# Altium PCB test1.PcbDoc
Units mm, origin at the board's own origin, x right, y up, seen from the top; angles counter-clockwise.
Board outline 70 x 20 mm, 3 copper layers (Top Layer, GND, Bottom Layer), stack 0.488 mm thick; 23 components, 27 nets, 107 pads, 49 vias.
Unrouted connection lines stored in the file: 59.
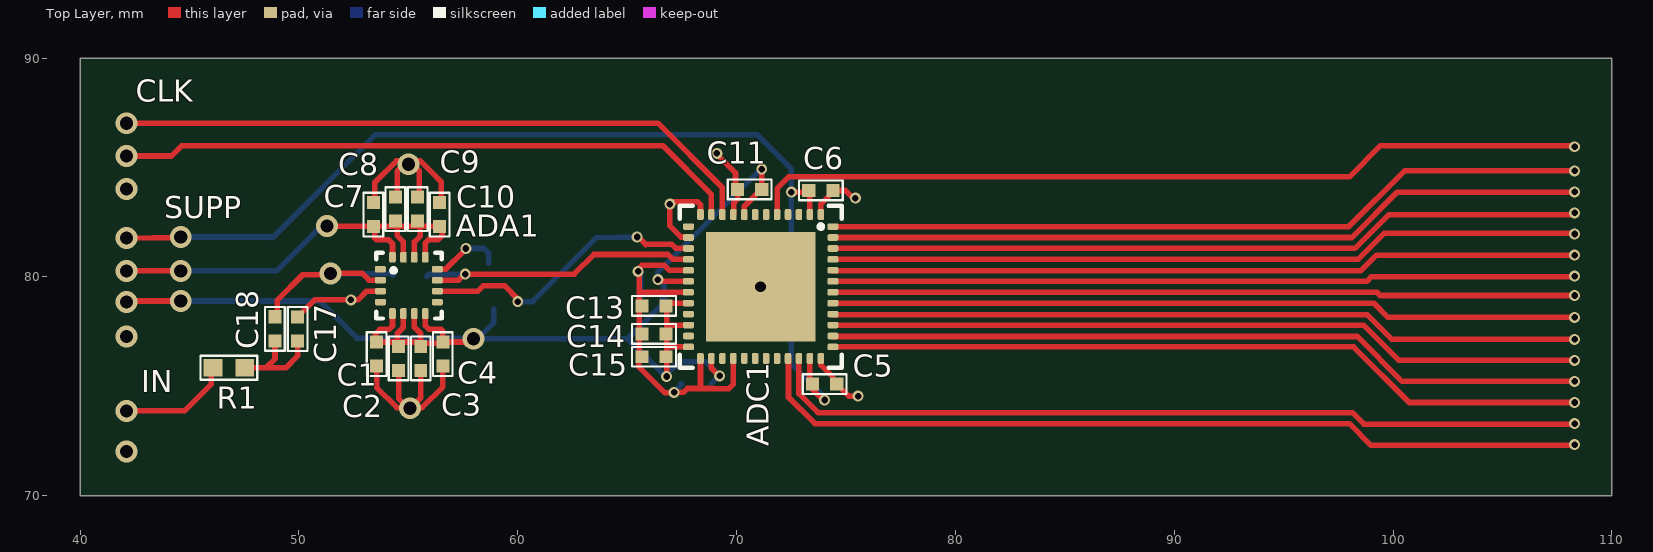
[diagram p0: Top Layer view]
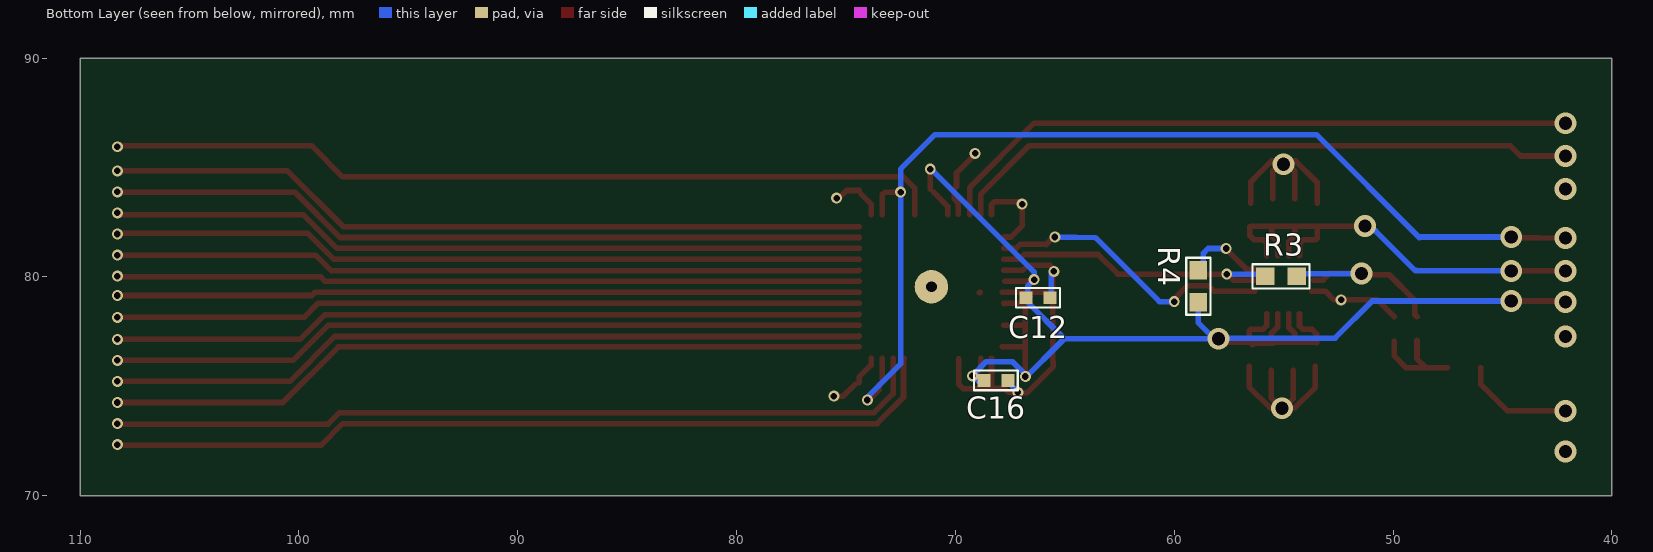
[diagram p1: Bottom Layer view, seen from below]
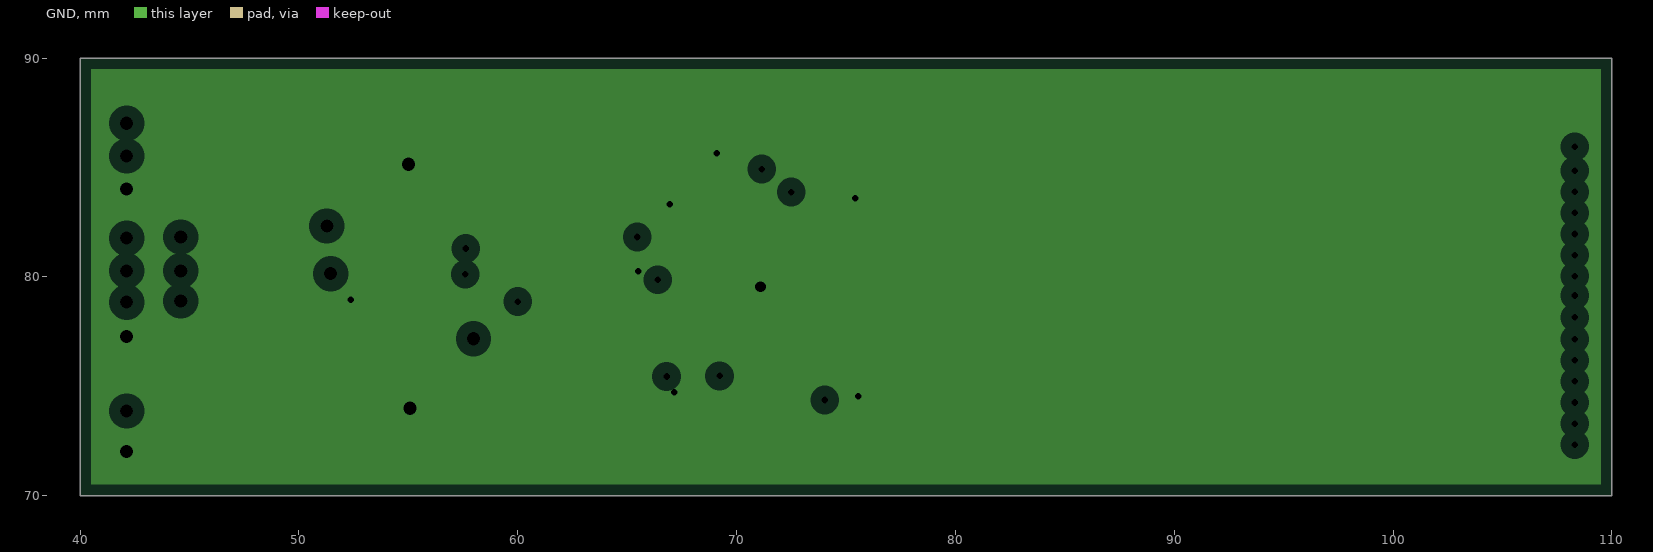
[diagram p2: GND, clearances drawn from the general rule]

## Layer stack, top to bottom
Top Solder: solder mask 0.0102, Solder Resist, Dk 3.5
Top Layer: signal copper 0.0356
Dielectric 1: core 0.254, FR-4, Dk 4.2
GND: plane copper 0.036, net GND
Dielectric 2: prepreg 0.127, Dk 4.2
Bottom Layer: signal copper 0.0356
Bottom Solder: solder mask 0.0102, Solder Resist, Dk 3.5

## Board outline
40,70 40,90 110,90 110,70

## Design rules (kind name [scope] priority, off if disabled: settings)
Clearance [All] p1: gap=0.2 ignorepadtopadclearanceinfootprint=FALSE
ComponentClearance [All] p1: gap=0 collisioncheckmode=3 verticalgap=2540 showdistances=FALSE
HoleToHoleClearance [All] p1: gap=0.2 allowstackedmicrovias=TRUE
MinimumSolderMaskSliver [All] p1: minsoldermaskwidth=0
PlaneClearance [All] p1: clearance=0.508
PlaneConnect [All] p1: planeconnectstyle=Relief reliefexpansion=0.508 reliefentries=4 reliefconductorwidth=0.254 reliefairgap=0.254
PolygonConnect [All] p1: connectstyle=Relief reliefconductorwidth=0.254 reliefentries=4 polygonreliefangle="90 Angle" airgapwidth=0.254
RoutingVias [All] p1: holewidth=0.711 width=1.27 viastyle="Through Hole" minholewidth=0.711 minwidth=1.27 maxholewidth=0.711 maxwidth=1.27
SilkToSilkClearance [All] p1: silktosilkclearance=0
SilkToSolderMaskClearance [IsPad] p1: minsilkscreentomaskgap=0.1 clearancetoexposedcopper=TRUE
SolderMaskExpansion [All] p1: expansion=0.102
Width [All] p1: maxlimit=0.254 minlimit=0.254 preferedwidth=0.254
23 further rules are at their usual default settings.

## Components (designator, comment, footprint, x,y, rotation, side; value= is the part's Value field where it differs from the comment)
ADA1 "*" "PCBComponent_1 - duplicate1" 55.025,79.6 r0 top
ADC1 "ADC" "PCBComponent_1 - duplicate2" 71.1,79.55 r270 top (schematic designator =model1)
C1 "0.1uF" "PCBComponent_1 - duplicate" 53.55,76.475 r270 top
C2 "0.1uF" "PCBComponent_1 - duplicate" 54.558,76.275 r270 top
C3 "0.1uF" "PCBComponent_1 - duplicate" 55.567,76.275 r270 top
C4 "0.1uF" "PCBComponent_1 - duplicate" 56.575,76.475 r270 top
C5 "0.1uF" "PCBComponent_1 - duplicate" 74.025,75.1 r180 top
C6 "0.1uF" "PCBComponent_1 - duplicate" 73.85,83.95 r0 top
C7 "0.1uF" "PCBComponent_1 - duplicate" 53.4,82.85 r270 top
C8 "0.1uF" "PCBComponent_1 - duplicate" 54.413,83.1 r270 top
C9 "0.1uF" "PCBComponent_1 - duplicate" 55.425,83.1 r270 top
C10 "0.1uF" "PCBComponent_1 - duplicate" 56.425,82.85 r270 top
C11 "0.1uF" "PCBComponent_1 - duplicate" 70.6,84 r0 top
C12 "0.1uF" "PCBComponent_1 - duplicate" 66.227,79.05 r180 bottom
C13 "0.1uF" "PCBComponent_1 - duplicate" 66.225,78.675 r0 top
C14 "0.1uF" "PCBComponent_1 - duplicate" 66.225,77.4 r0 top
C15 "0.1uF" "PCBComponent_1 - duplicate" 66.225,76.35 r180 top
C16 "0.1uF" "PCBComponent_1 - duplicate" 68.15,75.275 r0 bottom
C17 "0.1uF" "PCBComponent_1 - duplicate" 49.942,77.621 r90 top
C18 "0.1uF" "PCBComponent_1 - duplicate" 48.906,77.629 r90 top
R1 "1k" PCBComponent_1 46.8,75.85 r180 top
R3 "500" PCBComponent_1 55.125,80.025 r0 bottom
R4 "1k" PCBComponent_1 58.9,79.575 r270 bottom

## Footprints (in the part's own frame and the unit in brackets; to place one, negate y for a bottom-side part, rotate by r counter-clockwise, add the part's x,y. Pads: shape width x height; smd on the part's side, far side on the other; paste and mask are expansions set on the pad)
PCBComponent_1 [mm]
  rect 0.85x0.8 smd: 0(-0.725,0) 1(0.725,0)
  silkscreen extent -1.3,-0.55 1.3,0.55
"PCBComponent_1 - duplicate" [mm]
  rect 0.6x0.59 smd: 0(-0.55,0) 1(0.55,0)
  silkscreen extent -1,-0.45 1,0.45
"PCBComponent_1 - duplicate1" [mm]
  rrect50% 0.5x0.3 smd: 1(-1.3,0.75) 2(-1.3,0.25) 3(-1.3,-0.25) 4(-1.3,-0.75) 9(1.3,-0.75) 10(1.3,-0.25) 11(1.3,0.25) 12(1.3,0.75)
  rrect50% 0.3x0.5 smd: 5(-0.75,-1.275) 6(-0.25,-1.275) 7(0.25,-1.275) 8(0.75,-1.275) 13(0.75,1.3) 14(0.25,1.3) 15(-0.25,1.3) 16(-0.75,1.3)
  silkscreen extent -1.5,-1.5 1.5,1.5
"PCBComponent_1 - duplicate2" [mm]
  rrect50% 0.5x0.3 smd: 1(-3.3,2.75) 2(-3.3,2.25) 3(-3.3,1.75) 4(-3.3,1.25) 5(-3.3,0.75) 6(-3.3,0.25) 7(-3.3,-0.25) 8(-3.3,-0.75) 9(-3.3,-1.25) 10(-3.3,-1.75) 11(-3.3,-2.25) 12(-3.3,-2.75) 25(3.275,-2.75) 26(3.275,-2.25) 27(3.275,-1.75) 28(3.275,-1.25) 29(3.275,-0.75) 30(3.275,-0.25) 31(3.275,0.25) 32(3.275,0.75) 33(3.275,1.25) 34(3.275,1.75) 35(3.275,2.25) 36(3.275,2.75)
  rrect50% 0.3x0.5 smd: 13(-2.75,-3.3) 14(-2.25,-3.3) 15(-1.75,-3.3) 16(-1.25,-3.3) 17(-0.75,-3.3) 18(-0.25,-3.3) 19(0.25,-3.3) 20(0.75,-3.3) 21(1.25,-3.3) 22(1.75,-3.3) 23(2.25,-3.3) 24(2.75,-3.3) 37(2.75,3.3) 38(2.25,3.3) 39(1.75,3.3) 40(1.25,3.3) 41(0.75,3.3) 42(0.25,3.3) 43(-0.25,3.3) 44(-0.75,3.3) 45(-1.25,3.3) 46(-1.75,3.3) 47(-2.25,3.3) 48(-2.75,3.3)
  rect 5x5 / inner round 1.524 / far side round 1.524 hole 0.5: PAD(0,0)
  silkscreen extent -3.7,-3.7 3.7,3.7

## Part data
ADA1: library part "operational amplifier"
C1 C2 C3 C4 C5 C6 C7 C8 C9 C10 C11 C12 C13 C14 C15 C16 C17 C18: library part Capasitor_1
R1 R3 R4: library part resistor_1

## Via types
v1: diameter 0.5, hole 0.3, Top Layer to Bottom Layer, 32 vias
v2: diameter 1, hole 0.6, Top Layer to Bottom Layer, 17 vias

## Nets (pads, with @x,y where several pads share a name; then routed paths per layer and width w, separated by ;. In a path a pad name is that pad's centre, name@x,y a point inside that pad or via, vN(x,y) a via of type N, cw(c..) or ccw(c..) an arc to the next point about the centre after c; other vN are vias at no path point)
+1.8: ADC1.2 ADC1.35 C5.1 C6.0 | length 46.8
  Top Layer w0.254: v2@42.401,81.767 v2@44.2,81.802 ; v1(72.5,83.875) C6.0@73.2,83.875 ; C5.1@73.35,75.35 ADC1.35 ; ADC1.2 C6.0@73.35,83.775 ; C5.1 73.475,74.85 v1@73.9,74.425
  Bottom Layer w0.254: v2(44.6,81.825) 48.775,81.825 48.8,81.8 ; 48.828,81.822 53.505,86.5 70.925,86.5 72.5,84.925 72.5,84.025 v1@72.6,83.925 ; v1(72.5,83.875) 72.5,76.025 v1@74.1,74.425
  other v1: 74.025,74.375
  other v2: 42.125,81.775
+3.3: ADA1.5 ADA1.6 ADA1.7 ADA1.8 ADC1.8 ADC1.18 ADC1.20 ADC1.22 ADC1.24 ADC1.26 C1.0 C2.0 C3.0 C4.0 C11.1 C12.0 C13.1 C14.1 C15.0 C16.1 R4.1 | length 61.6
  Top Layer w0.254: v2@42.4,78.9 v2@44.225,78.9 ; C1.0@53.5,77 C1.0@53.5,77.025 ; ADA1.5 54.275,77.75 54.125,77.6 53.7,77.6 53.5,77.4 C1.0@53.5,77.025 ; ADA1.6 54.775,77.7 54.5,77.425 C2.0@54.5,77.025 ; ADA1.7 55.275,77.7 55.567,77.408 55.567,77.067 C3.0@55.525,77.025 ; ADA1.8 55.775,77.775 55.95,77.6 56.5,77.6 56.575,77.525 56.575,77.05 C4.0@56.55,77.025 ; C4.0@56.425,76.9 C4.0@56.5,76.975 ; v2@57.65,76.95 57.575,77.025 C4.0 C4.0@56.55,77.025 ; v1@66.55,79.8 ADC1.18@67.75,79.803 ; v1@66.8,75.575 C13.1@66.8,78.65 ; 66.875,76.8 ADC1.24 ADC1.24@67.85,76.8 ; C13.1@66.925,78.8 ADC1.20 ADC1.20@67.777,78.777 ; 66.95,77.8 ADC1.22 ; ADC1.26 68.85,75.825 v1@69.15,75.525 ; ADC1.8 70.35,83.225 C11.1@71,83.875 ; C11.1 v1@71.15,84.8 ; C1.0@53.5,77.025 C1.0 C2.0@54.5,77.025 ; C2.0@54.5,77.025 C3.0@55.525,77.025 ; C3.0@55.525,77.025 55.475,76.975 C4.0@56.5,76.975 ; C4.0@56.5,76.975 C4.0@56.55,77.025
  Bottom Layer w0.254: v2@44.7,78.9 50.95,78.9 52.65,77.2 v2@57.8,77.2 ; v2(57.975,77.175) 65.025,77.175 ; v2@58.275,77.275 58.9,77.9 R4.1@58.9,78.525 ; v1(66.4,79.875) 66.7,79.575 66.7,79.175 C12.0@66.6,79.075 ; v1@66.4,79.925 66.4,80.225 71,84.825 v1@71.05,84.825 ; v1@66.7,75.5 65.3,76.9 65.025,77.175 ; C12.0@66.725,79.05 66.725,78.875 65.025,77.175 ; v1(66.8,75.45) 66.8,75.533 67.393,76.125 68.6,76.125 v1@69.2,75.525 ; C16.1@68.85,75.125 69.225,75.5 v1(69.225,75.475)
  other v1: 71.15,84.925
  other v2: 42.125,78.85 44.6,78.9
-3.3: ADA1.13 ADA1.14 ADA1.15 ADA1.16 C7.1 C8.1 C9.1 C10.1 | length 21
  Top Layer w0.254: v2@42.3,80.275 v2@44.175,80.275 ; v2(51.275,82.325) 56.475,82.325 C10.1@56.5,82.3 ; C7.1@53.475,82.25 53.475,81.775 53.55,81.7 54.1,81.7 54.275,81.525 ADA1.16@54.275,80.975 ; 54.483,82.233 54.483,81.892 54.775,81.6 ADA1.15@54.775,80.975 ; ADA1.14@55.275,80.975 55.275,81.6 55.55,81.875 C9.1@55.55,82.275 ; ADA1.13@55.775,80.975 55.775,81.55 55.925,81.7 56.35,81.7 56.55,81.9 C10.1@56.55,82.3
  Bottom Layer w0.254: v2@44.7,80.275 48.925,80.275 48.95,80.3 48.975,80.275 50.8,82.1 v2@51.2,82.1
  other v2: 42.125,80.275 44.6,80.275
CLKM: ADC1.11 | length 28.9
  Top Layer w0.254: v2@42,85.525 44.175,85.525 44.65,86 66.625,86 68.85,83.775 ADC1.11
  other v2: 42.125,85.525
CLKOUT: ADC1.5 | length 38.3
  Top Layer w0.254: ADC1.5 71.85,84.041 72.381,84.572 98,84.572 99.428,86 v1@108.125,86
  other v1: 108.3,85.95
CLKP: ADC1.10 | length 29.7
  Top Layer w0.254: v2@42,87.025 66.4,87.025 69.35,84.075 69.35,83.825 ; ADC1.10 69.35,83.775
  other v2: 42.125,87.025
D0: ADC1.33 | length 38.5
  Top Layer w0.254: ADC1.33 72.373,76.252 72.373,74.503 73.576,73.3 98,73.3 99,72.3 v1@108.2,72.3
  other v1: 108.3,72.337
D1: ADC1.34 | length 37.5
  Top Layer w0.254: ADC1.34 72.848,76.273 72.848,74.67 73.72,73.798 98.144,73.798 98.667,73.275 v1@108.2,73.275
  other v1: 108.3,73.3
D2: ADC1.37 | length 34.9
  Top Layer w0.254: ADC1.37 98.2,76.8 100.738,74.262 v1@108.2,74.262
  other v1: 108.3,74.262
D3: ADC1.38 | length 34.7
  Top Layer w0.254: ADC1.38 74.423,77.277 98.365,77.277 100.417,75.225 v1@108.2,75.225
  other v1: 108.3,75.225
D4: ADC1.39 | length 34.5
  Top Layer w0.254: ADC1.39 98.65,77.8 100.263,76.187 v1@108.2,76.187
  other v1: 108.3,76.187
D5: ADC1.40 | length 34.3
  Top Layer w0.254: ADC1.40 74.423,78.277 98.815,78.277 99.942,77.15 v1@108.2,77.15
  other v1: 108.3,77.15
D6: ADC1.41 | length 34.1
  Top Layer w0.254: ADC1.41 99.117,78.8 99.765,78.152 v1@108.2,78.152
  other v1: 108.3,78.152
D7: ADC1.42 | length 33.9
  Top Layer w0.254: ADC1.42 99.259,79.3 99.409,79.15 v1@108.2,79.15
  other v1: 108.3,79.15
D8: ADC1.43 | length 33.9
  Top Layer w0.254: ADC1.43 98.8,79.8 99,80 v1@108.2,80
  other v1: 108.3,80.037
D9: ADC1.44 | length 34.1
  Top Layer w0.254: ADC1.44 74.423,80.277 74.742,80.277 74.744,80.275 98.518,80.275 99.243,81 v1@108.2,81
  other v1: 108.3,81
D10: ADC1.45 | length 34.3
  Top Layer w0.254: ADC1.45 98.401,80.8 99.601,82 v1@108.2,82
  other v1: 108.3,81.962
D11: ADC1.46 | length 34.4
  Top Layer w0.254: ADC1.46 98.259,81.3 99.809,82.85 v1@108.2,82.85
  other v1: 108.3,82.925
D12: ADC1.47 | length 34.7
  Top Layer w0.254: ADC1.47 98.117,81.8 100.192,83.875 108.125,83.875 v1@108.2,83.95
  other v1: 108.3,83.887
D13: ADC1.48 | length 34.8
  Top Layer w0.254: ADC1.48 97.975,82.3 100.525,84.85 v1@108.125,84.85
  other v1: 108.3,84.85
GND: ADA1.3 ADC1.1 ADC1.9 ADC1.12 ADC1.14 ADC1.17 ADC1.19 ADC1.25 ADC1.28 ADC1.36 ADC1.PAD C1.1 C2.1 C3.1 C4.1 C5.0 C6.1 C7.0 C8.0 C9.0 C10.0 C11.0 C12.1 C13.0 C14.0 C15.1 C16.0 C17.1 | length 51.1
  Top Layer w0.254: C17.1 50.721,78.95 52.25,78.95 v1@52.3,78.9 ; v1@52.5,78.95 52.7,78.95 53.1,79.35 ADA1.3 ; C7.0@53.475,83.375 53.475,84.325 54.45,85.3 v2@54.65,85.3 ; C1.1 53.55,74.95 54.475,74.025 55.625,74.025 56.575,74.975 C4.1 ; C8.0@54.483,83.575 54.483,84.833 v2@54.725,85.075 ; C2.1 54.558,74.442 v2@54.8,74.2 ; v2@55.25,85.1 55.492,84.858 C9.0@55.492,83.575 ; v2@55.3,74.2 55.567,74.467 C3.1 ; v2@55.35,85.3 55.55,85.3 56.05,84.8 56.5,84.35 C10.0@56.5,83.375 ; 65.6,79.3 65.603,79.297 67.797,79.297 ADC1.19 ADC1.19@67.85,79.3 ; v1@66.952,83.125 66.952,82.33 67.459,81.823 67.777,81.823 ADC1.14 ; v1@67.088,74.613 67,74.7 66.734,74.7 65.525,75.909 65.525,76.125 65.55,76.15 65.55,80.4 65.675,80.525 66.7,80.525 66.925,80.3 ADC1.17 ; v1@67.088,83.425 68.225,83.425 68.35,83.3 ADC1.12 ; v1@67.3,74.75 67.327,74.723 67.573,74.723 67.75,74.9 68.93,74.9 68.932,74.898 69.648,74.898 69.85,75.1 ADC1.28@69.85,76.25 ; 68.35,74.925 ADC1.25 ; ADC1.PAD@68.875,79.3 ADC1.PAD@68.9,79.275 ; v1(69.1,85.65) 69.1,85.598 69.95,84.748 C11.0@69.95,84.125 ; ADC1.9@69.873,82.873 69.873,83.39 70.05,83.567 C11.0@70.05,83.95 ; ADC1.36 73.85,75.975 74.4,75.425 C5.0@74.4,75.175 ; ADC1.1 73.85,83.325 C6.1@74.3,83.775 ; C6.1 74.975,83.95 v1@75.3,83.625 ; C5.0 75.125,74.55 v1@75.5,74.55
  Bottom Layer w0.254: v1(65.5,80.25) 65.625,80.125 65.625,79.075 C12.1@65.55,79.15 ; v1(67.15,74.725) 67.125,74.725 67.488,75.088 C16.0@67.45,75.125
  other v1: 75.55,74.55 52.375,78.95 66.952,83.325 75.425,83.6
  other v2: 42.125,72.025 55.075,74 42.125,77.275 42.125,84.025 55,85.15
INPUT+: R1.1 | length 5.1
  Top Layer w0.254: v2(42.125,73.875) 44.775,73.875 46,75.1 R1.1@46,75.85
NetADA1_2: ADA1.2 C18.1 R3.0 | length 8.9
  Top Layer w0.254: C18.1 49,78.273 49,78.9 ; 49.013,78.938 50.175,80.1 51.275,80.1 51.35,80.175 52.875,80.175 53.2,79.85 ADA1.2@53.625,79.85
  Bottom Layer w0.254: v2(51.45,80.15) 54.225,80.15 R3.0@54.3,80.075
NetADA1_10: ADA1.10 ADC1.15 | length 12.9
  Top Layer w0.254: ADA1.10 57.05,79.35 58.175,79.35 58.425,79.6 59.4,79.6 v1@60,79 ; v1@65.603,81.725 65.849,81.479 ; 65.849,81.5 67.03,81.5 67.23,81.3 ADC1.15
  Bottom Layer w0.254: v1(60,78.875) 60.675,78.875 63.6,81.8 ; 63.6,81.793 v1@65.3,81.825
  other v1: 65.459,81.825
NetADA1_11: ADA1.11 ADC1.16 R3.1 | length 13.6
  Top Layer w0.254: ADA1.11 57.3,79.85 v1@57.55,80.1 ; v1(57.6,80.125) 62.575,80.125 63.475,81.025 64.175,81.025 ; 64.2,81.025 66.863,81.025 67.088,80.8 ADC1.16
  Bottom Layer w0.254: R3.1 55.95,80.125 v1@57.425,80.125
NetADA1_12: ADA1.12 R4.0 | length 3.1
  Top Layer w0.254: ADA1.12 56.7,80.35 v1@57.512,81.162
  Bottom Layer w0.254: v1(57.625,81.3) 58.45,81.3 58.675,81.075 R4.0@58.675,80.625
NetC17_0: C17.0 C18.0 R1.0 | length 4.7
  Top Layer w0.254: R1.0 48.5,75.85 ; C18.0@48.906,77.1 C18.0 48.906,76.255 48.5,75.85 ; C17.0@49.942,77.05 49.942,76.392 49.4,75.85 48.5,75.85
pads on no net: ADA1.1 ADA1.4 ADA1.9 ADC1.3 ADC1.4 ADC1.6 ADC1.7 ADC1.13 ADC1.21 ADC1.23 ADC1.27 ADC1.29 ADC1.30 ADC1.31 ADC1.32

## Polygon pours and split planes (outlines as drawn)
GND on GND (split plane): 109.49,70.51 40.51,70.51 40.51,89.49 109.49,89.49

## Silkscreen, mask and mechanical layers (free items; w line width, h text height)
Top Overlay:
  text "CLK" at 42.546,88 h1
  text "SUPP" at 43.846,82.676 h1
  text "IN" at 42.8,74.737 h1